# Altium PCB L PCB.PcbDoc
Units mm, origin at the board's own origin, x right, y up, seen from the top; angles counter-clockwise.
Board outline 72.39 x 48.13 mm, 2 copper layers (Top Layer, Bottom Layer); 3 components, 8 nets, 20 pads, 12 vias.
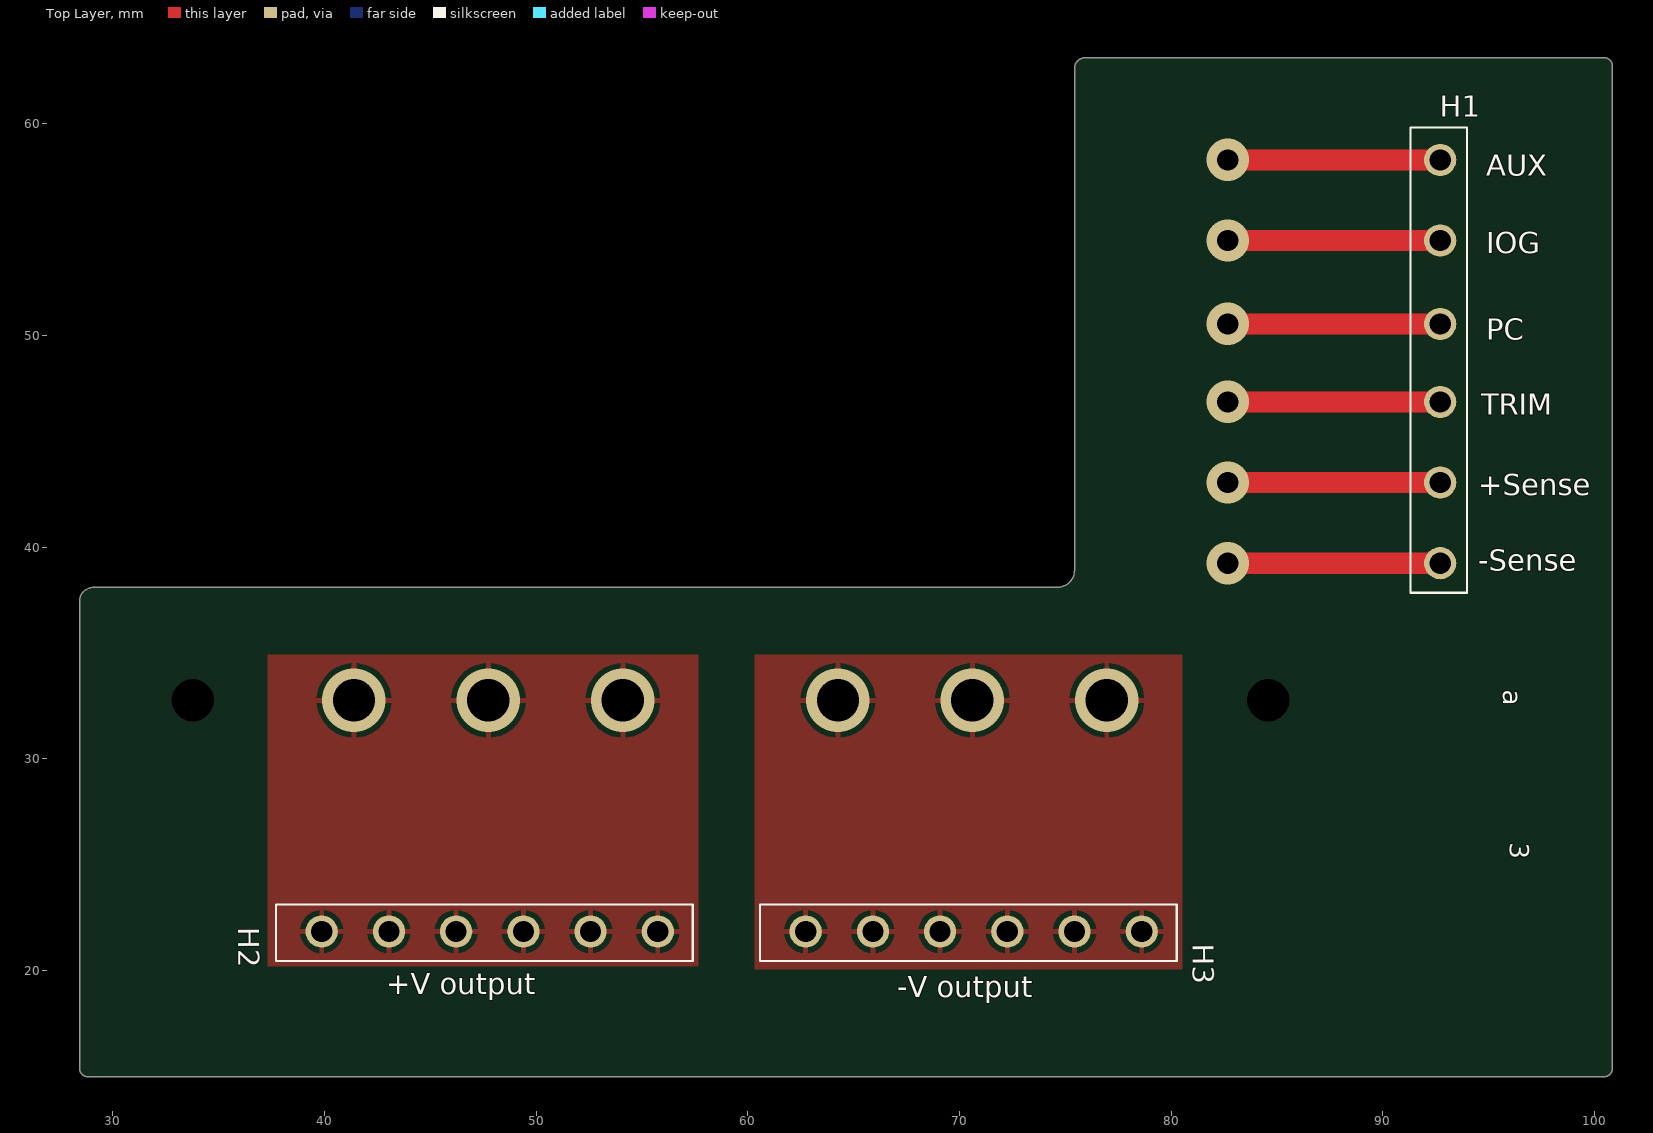
[diagram p0: Top Layer view]
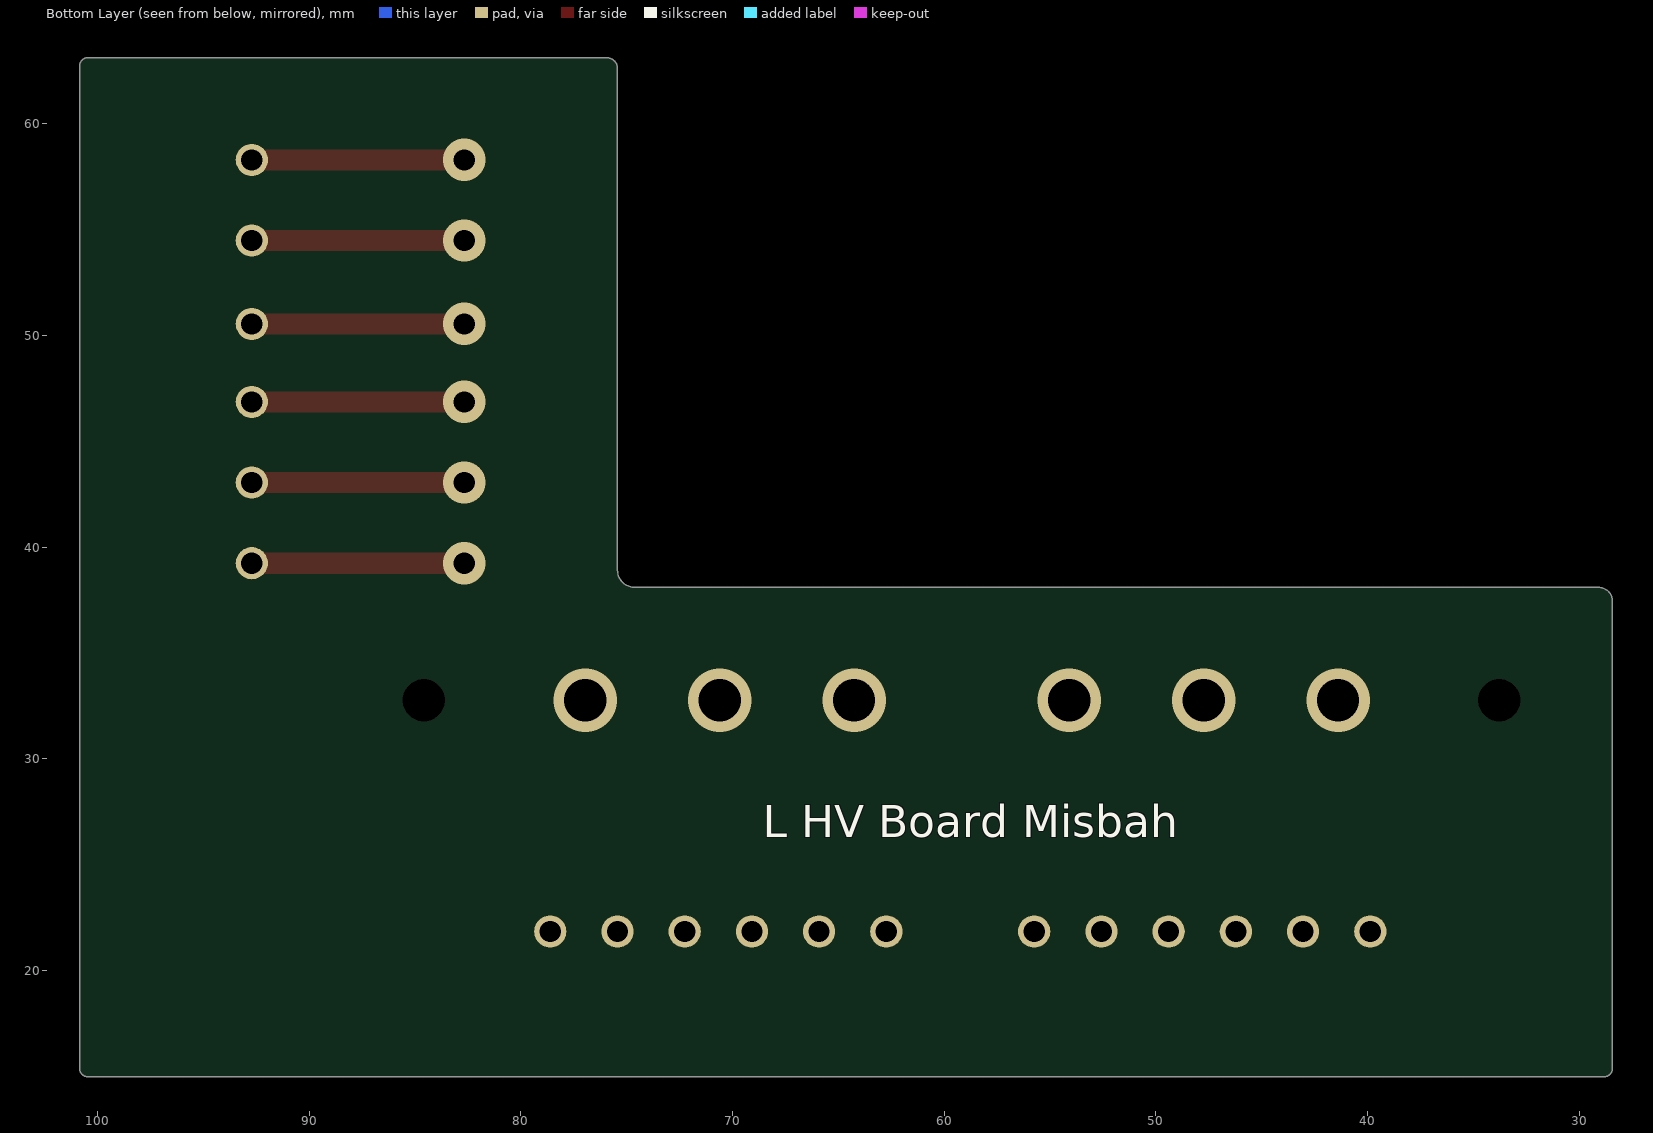
[diagram p1: Bottom Layer view, seen from below]

## Layer stack, top to bottom
Top Solder: solder mask 0.0102, Solder Resist, Dk 3.5
Top Layer: signal copper 0.0356
Dielectric 1: dielectric 0.32, FR-4, Dk 4.8
Bottom Layer: signal copper 0.0356
Bottom Solder: solder mask 0.0102, Solder Resist, Dk 3.5

## Board outline
28.448,15.367 ccw(c28.829,15.367) 28.829,14.986 100.457,14.986 ccw(c100.457,15.367) 100.838,15.367 100.838,62.738 ccw(c100.457,62.738) 100.457,63.119 75.946,63.119 ccw(c75.946,62.611) 75.438,62.611 75.438,38.919 cw(c74.619,38.919) 74.619,38.1 29.083,38.1 ccw(c29.083,37.465) 28.448,37.465

## Design rules (kind name [scope] priority, off if disabled: settings)
Clearance [All] p1: gap=0.152 ignorepadtopadclearanceinfootprint=FALSE
NetAntennae [OnLayer('Bottom Layer')] p1: netantennaetolerance=100
PolygonConnect [All] p1: connectstyle=Relief reliefconductorwidth=0.254 reliefentries=4 polygonreliefangle="90 Angle" airgapwidth=0.254
RoutingVias [All] p1: holewidth=0.711 width=1.27 viastyle="Through Hole" minholewidth=0.711 minwidth=1.27 maxholewidth=0.711 maxwidth=1.27
SolderMaskExpansion [All] p1: expansion=0.102 istentingtop=FALSE
Width [All] p1: maxlimit=1 minlimit=0.254 preferedwidth=0.254
29 further rules are at their usual default settings.

## Components (designator, comment, footprint, x,y, rotation, side; value= is the part's Value field where it differs from the comment)
H1 "Main" Main 92.71,39.243 r90 top
H2 "+Vout" "+/- Voutput" 57.404,23.114 r180 top
H3 "-Vout" "+/- Voutput" 80.264,23.114 r180 top

## Footprints (in the part's own frame and the unit in brackets; to place one, negate y for a bottom-side part, rotate by r counter-clockwise, add the part's x,y. Pads: shape width x height; smd on the part's side, far side on the other; paste and mask are expansions set on the pad)
"+/- Voutput" [mil]
  round 60 hole 39.37: 1(65,50) 2(190,50) 3(315,50) 4(440,50) 5(565,50) 6(690,50)
  silkscreen extent 0,0 775,105
Main [mil]
  round 60 hole 39.37: 1(0,0) 2(150,0) 3(300,0) 4(445,0) 5(600,0) 6(750,0)
  silkscreen extent -55,-50 810,55

## Part data
H1: "PH Series 6 Position Through Hole Single Row Straight .100 Header", Manufacturer="Adam Equipment", Manufacturer Part Number=PH1-06-UA, Supplier Part Number=2057-PH1-06-UA-ND, Category=Connectors, ComponentLink1Description=http://www.adam-tech.com/catalog/2012/page_312-315.pdf?src-supplier=Future+Electronics, ComponentLink1URL=http://www.adam-tech.com/catalog/2012/page_312-315.pdf?src-supplier=Future+Electronics, Contact Plating=Gold, Lead Free="Lead Free", Mounting Technology="Through Hole", Number of Contacts=6, Number of Positions=6, Number of Rows=1, Packaging=Bag, Pitch=2.54mm, Pricing="1=0.13000, 10=0.09900, 100=0.07320, 500=0.06060, 1000=0.05302, 5000=0.04545, 10000=0.04419 (USD)", RoHS=Yes, Stock=25838, Supplier=Digi-Key, Supplier 1=Digi-Key, Supplier Part Number 1=2057-PH1-06-UA-ND
H2 H3: library part "+/- Voutput", "PH Series 6 Position Through Hole Single Row Straight .100 Header", Manufacturer="Adam Equipment", Manufacturer Part Number=PH1-06-UA, Supplier Part Number=2057-PH1-06-UA-ND, Category=Connectors, ComponentLink1Description=http://www.adam-tech.com/catalog/2012/page_312-315.pdf?src-supplier=Future+Electronics, ComponentLink1URL=http://www.adam-tech.com/catalog/2012/page_312-315.pdf?src-supplier=Future+Electronics, Contact Plating=Gold, Lead Free="Lead Free", Mounting Technology="Through Hole", Number of Contacts=6, Number of Positions=6, Number of Rows=1, Packaging=Bag, Pitch=2.54mm, Pricing="1=0.13000, 10=0.09900, 100=0.07320, 500=0.06060, 1000=0.05302, 5000=0.04545, 10000=0.04419 (USD)", RoHS=Yes, Stock=25838, Supplier=Digi-Key, Supplier 1=Digi-Key, Supplier Part Number 1=2057-PH1-06-UA-ND

## Free pads (board coordinates)
  round 0 hole 2: 9(33.782,32.766) 9(84.582,32.766)

## Via types
v1: diameter 2, hole 1, Top Layer to Bottom Layer, 6 vias
v2: diameter 3, hole 2, Top Layer to Bottom Layer, 6 vias

## Nets (pads, with @x,y where several pads share a name; then routed paths per layer and width w, separated by ;. In a path a pad name is that pad's centre, name@x,y a point inside that pad or via, vN(x,y) a via of type N, cw(c..) or ccw(c..) an arc to the next point about the centre after c; other vN are vias at no path point)
+S: H1.2 | length 10
  Top Layer w1: v1(82.677,43.053) H1.2
+Voutput: H2.1 H2.2 H2.3 H2.4 H2.5 H2.6
  other v2: 41.402,32.766 47.752,32.766 54.102,32.766
-S: H1.1 | length 10
  Top Layer w1: v1(82.677,39.243) H1.1
-Vout: H3.1 H3.2 H3.3 H3.4 H3.5 H3.6
  other v2: 64.262,32.766 70.612,32.766 76.962,32.766
AUX: H1.6 | length 10
  Top Layer w1: v1(82.677,58.293) H1.6
IOG: H1.5 | length 10
  Top Layer w1: v1(82.677,54.483) H1.5
PC: H1.4 | length 10
  Top Layer w1: v1(82.677,50.546) H1.4
TRIM: H1.3 | length 10
  Top Layer w1: v1(82.677,46.863) H1.3

## Polygon pours and split planes (outlines as drawn)
+Voutput on Top Layer "+VOUTPUT_L01_P002" (solid, pour order 2): 37.338,34.925 57.658,34.925 57.658,20.193 37.338,20.193
-Vout on Top Layer "-VOUT_L01_P003" (solid, pour order 3): 60.325,34.925 60.325,20.066 80.518,20.066 80.518,34.925

## Silkscreen, mask and mechanical layers (free items; w line width, h text height)
Top Overlay:
  text "AUX" at 94.894,57.556 h1
  text "IOG" at 94.894,53.873 h1
  text "PC" at 94.894,49.809 h1
  text "TRIM" at 94.64,46.253 h1
  text "+Sense" at 94.513,42.443 h1
  text "-Sense" at 94.513,38.887 h1
  text "a" at 95.377,33.274 h1.52 r270
  text "3" at 95.717,26.073 h1.52 r268.64
  text "+V output" at 42.926,18.875 h1
  text "-V output" at 67.056,18.748 h1
Bottom Overlay:
  text "L HV Board Misbah" at 68.58,26.289 h1.52
Mechanical 1:
  the board outline again, w0.1